# EAGLE board Back (EAGLE 7.4.0)
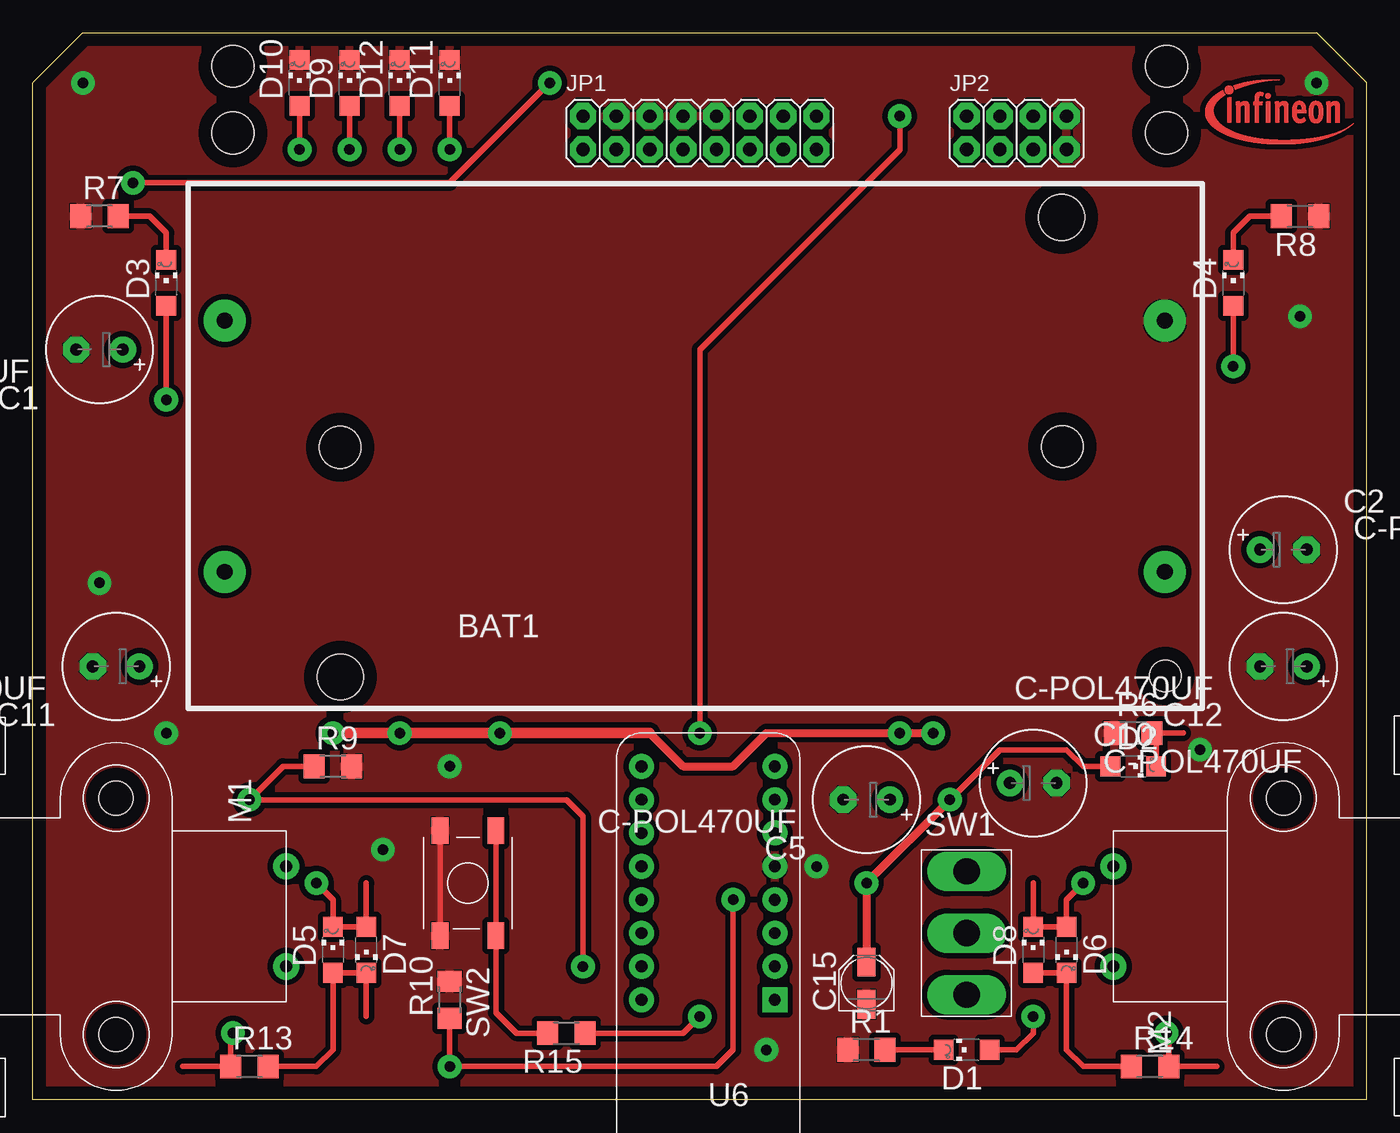
[diagram p0: board, top side]
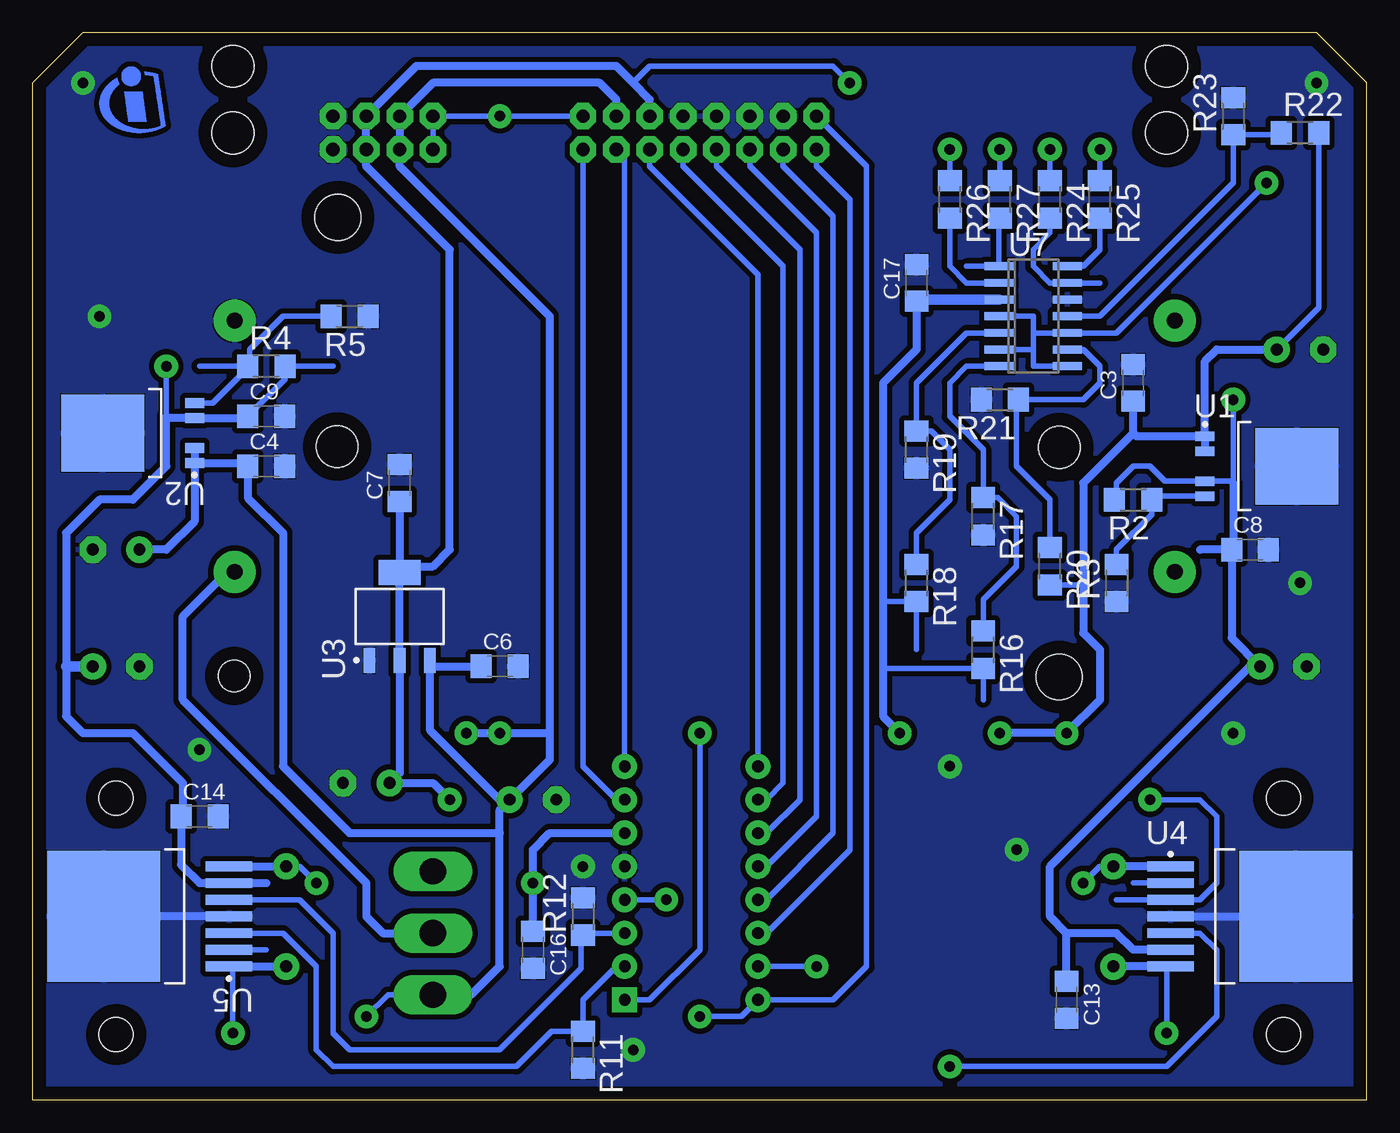
[diagram p1: board, bottom side, seen from below]

Size 101.6 x 81.28 mm. Coordinates in mm from the lower left corner, seen from the top.
Outline: 101.6,0 0,0 0,77.47 3.81,81.28 97.79,81.28 101.6,77.47 101.6,0
Copper layers (1*16): Top 0.035mm / dielectric 1.5mm / Bottom 0.035mm
Design rules "Line_Follower_Rules": minimum track width 0.3mm, minimum drill 0.3mm, track to track 0.17mm, track to pad 0.17mm, pad to pad 0.17mm, via to via 0.17mm, smd to smd 0.17mm, copper to edge 1mm, drill to drill 0.5mm, minimum pad ring 0.5mm, minimum via ring 0.5mm, stop-mask expansion 4mil, vias tented up to drill 0mil, thermal gap 0.1mm
Holes 3.2 mm at 15.24,73.66 86.36,78.74 86.36,73.66 15.24,78.74

## Footprints (pad centres in the part's own frame; a part is rotated, then mirrored left to right if it is on the bottom)
BATT_SUPPORT_KEYSTONE = drill 1.2 pad 3.2: + 34.156,-10.58; ++ -37.45,8.55; - -37.45,-10.58; -- 34.156,8.55 | hole 3.2: -28.657,-1.092; 26.35,-1.036 | hole 3.5: -28.64,-18.583; 26.286,16.418 | hole 2.4: 34.199,-18.509
E3,5-8 = drill 0.9 pad 2: + -1.778,0 | drill 0.9 pad 2 octagon: - 1.778,0
C1206 = smd 1.6 x 1.8: 1 -1.4,0; 2 1.4,0
PANASONIC_B = smd 2.2 x 1.4: + 1.6,0; - -1.6,0
CHIPLED_1206 = smd 1.5 x 1.5: A 0,-1.75; C 0,1.75
2X08 = drill 1.016 octagon: 1 -8.89,-1.27; 2 -8.89,1.27; 3 -6.35,-1.27; 4 -6.35,1.27; 5 -3.81,-1.27; 6 -3.81,1.27; 7 -1.27,-1.27; 8 -1.27,1.27; 9 1.27,-1.27; 10 1.27,1.27; 11 3.81,-1.27; 12 3.81,1.27; 13 6.35,-1.27; 14 6.35,1.27; 15 8.89,-1.27; 16 8.89,1.27
2X04 = drill 1.016 octagon: 1 -3.81,-1.27; 2 -3.81,1.27; 3 -1.27,-1.27; 4 -1.27,1.27; 5 1.27,-1.27; 6 1.27,1.27; 7 3.81,-1.27; 8 3.81,1.27
MICRO-MOTOR = drill 0.9 pad 2: M1 -3.81,12.95; M2 3.81,12.95 | hole 2.6: -9,0; 9,0
R1206 = smd 1.6 x 1.803: 1 -1.422,0; 2 1.422,0
MS111 = drill 2 pad 3 long: P$1 0,4.7; P$2 0,0; P$3 0,-4.7
SWPB_SMD = smd 2.032 x 1.27: P$1 -4,-2; P$2 4,-2; P$3 4,2.25; P$4 -4,2.25
INF-PG-TO252-5-11_L_1PRIMARY = smd 1.45 x 0.75: 1 -4.7,2.28; 2 -4.7,1.14; 4 -4.7,-1.14; 5 -4.7,-2.28 | smd 6.3 x 5.85: 3 2.3,0
INF-PG-SOT223_SC-73_M_1PRIMARY = smd 1.9 x 0.9: 1 -3.35,2.3; 2 -3.35,0; 3 -3.35,-2.3 | smd 1.9 x 3.2: 4 3.35,0
INF-PG-TO263-7-1_L_1PRIMARY = smd 3.55 x 0.75: 1 -6.05,3.81; 2 -6.05,2.54; 3 -6.05,1.27; 4 -6.05,0; 5 -6.05,-1.27; 6 -6.05,-2.54; 7 -6.05,-3.81 | smd 8.6 x 10: 8 3.5,0
XMC_2_GO = drill 0.9 pad 1.676 square: 1 -5.715,0 | drill 0.9 pad 1.676: 2 -5.715,-2.54; 3 -5.715,-5.08; 4 -5.715,-7.62; 5 -5.715,-10.16; 6 -5.715,-12.7; 7 -5.715,-15.24; 8 -5.715,-17.78; 9 4.445,-17.78; 10 4.445,-15.24; 11 4.445,-12.7; 12 4.445,-10.16; 13 4.445,-7.62; 14 4.445,-5.08; 15 4.445,-2.54; 16 4.445,0
SO14 = smd 0.6 x 2.2: 1 -3.81,-2.6; 2 -2.54,-2.6; 3 -1.27,-2.6; 4 0,-2.6; 5 1.27,-2.6; 6 2.54,-2.6; 7 3.81,-2.6; 8 3.81,2.6; 9 2.54,2.6; 10 1.27,2.6; 11 0,2.6; 12 -1.27,2.6; 13 -2.54,2.6; 14 -3.81,2.6

## Placement (x,y rotation side)
BAT1  BATTERY_HOLDER  [BATT_SUPPORT_KEYSTONE]  52.07,50.8 0 top
C1  C-POL470UF  [E3,5-8]  5.08,57.15 180 top
C2  C-POL470UF  [E3,5-8]  95.25,41.91 0 top
C3  C_NONPOL100NF  [C1206]  17.78,54.61 90 bottom
C4  C_NONPOL100NF  [C1206]  83.82,48.26 0 bottom
C5  C-POL470UF  [E3,5-8]  63.5,22.86 180 top
C6  C_NONPOL100NF  [C1206]  66.04,33.02 0 bottom
C7  C_NONPOL100NF  [C1206]  73.66,46.99 90 bottom
C8  C_NONPOL100NF  [C1206]  8.89,41.91 0 bottom
C9  C_NONPOL100NF  [C1206]  83.82,52.07 0 bottom
C10  C-POL470UF  [E3,5-8]  76.2,24.13 0 top
C11  C-POL470UF  [E3,5-8]  6.35,33.02 180 top
C12  C-POL470UF  [E3,5-8]  95.25,33.02 180 top
C13  C_NONPOL100NF  [C1206]  22.86,7.62 270 bottom
C14  C_NONPOL100NF  [C1206]  88.9,21.59 0 bottom
C15  C-POL10UF  [PANASONIC_B]  63.5,8.89 90 top
C16  C_NONPOL100NF  [C1206]  63.5,11.43 270 bottom
C17  C_NONPOL100NF  [C1206]  34.29,62.23 90 bottom
D1  LED  [CHIPLED_1206]  71.12,3.81 90 top
D2  LED  [CHIPLED_1206]  83.82,25.4 270 top
D3  LED  [CHIPLED_1206]  10.16,62.23 0 top
D4  LED  [CHIPLED_1206]  91.44,62.23 0 top
D5  LED  [CHIPLED_1206]  22.86,11.43 0 top
D6  LED  [CHIPLED_1206]  78.74,11.43 180 top
D7  LED  [CHIPLED_1206]  25.4,11.43 180 top
D8  LED  [CHIPLED_1206]  76.2,11.43 0 top
D9  LED  [CHIPLED_1206]  24.13,77.47 0 top
D10  LED  [CHIPLED_1206]  20.32,77.47 0 top
D11  LED  [CHIPLED_1206]  31.75,77.47 0 top
D12  LED  [CHIPLED_1206]  27.94,77.47 0 top
JP1  [2X08]  50.8,73.66 0 top
JP2  [2X04]  74.93,73.66 0 top
M1  MOTOR_PCBMOTOR  [MICRO-MOTOR]  6.35,13.97 270 top
M2  MOTOR_PCBMOTOR  [MICRO-MOTOR]  95.25,13.97 90 top
R1  470R  [R1206]  63.5,3.81 0 top
R2  56k  [R1206]  17.78,45.72 180 bottom
R3  12k  [R1206]  19.05,39.37 90 bottom
R4  56k  [R1206]  83.82,55.88 0 bottom
R5  12k  [R1206]  77.47,59.69 180 bottom
R6  470R  [R1206]  83.82,27.94 0 top
R7  470R  [R1206]  5.08,67.31 0 top
R8  470R  [R1206]  96.52,67.31 180 top
R9  12K  [R1206]  22.86,25.4 0 top
R10  12K  [R1206]  31.75,7.62 90 top
R11  12K  [R1206]  59.69,3.81 270 bottom
R12  12K  [R1206]  59.69,13.97 90 bottom
R13  470R  [R1206]  16.51,2.54 0 top
R14  470R  [R1206]  85.09,2.54 0 top
R15  470R  [R1206]  40.64,5.08 180 top
R16  51k  [R1206]  29.21,34.29 270 bottom
R17  43k  [R1206]  29.21,44.45 270 bottom
R18  47k  [R1206]  34.29,39.37 270 bottom
R19  43k  [R1206]  34.29,49.53 270 bottom
R20  62k  [R1206]  24.13,40.64 270 bottom
R21  43k  [R1206]  27.94,53.34 180 bottom
R22  56k  [R1206]  5.08,73.66 0 bottom
R23  43k  [R1206]  10.16,74.93 90 bottom
R24  470R  [R1206]  24.13,68.58 270 bottom
R25  470R  [R1206]  20.32,68.58 270 bottom
R26  470R  [R1206]  31.75,68.58 270 bottom
R27  470R  [R1206]  27.94,68.58 270 bottom
SW1  SWITCH1OFF2  [MS111]  71.12,12.7 0 top
SW2  PUSH_BUTTON_SMD  [SWPB_SMD]  33.02,16.51 270 top
U1  TLF1963  [INF-PG-TO252-5-11_L_1PRIMARY]  7.62,48.26 0 bottom
U2  TLF1963  [INF-PG-TO252-5-11_L_1PRIMARY]  93.98,50.8 180 bottom
U3  IFX8117ME_3V3  [INF-PG-SOT223_SC-73_M_1PRIMARY]  73.66,36.83 90 bottom
U4  TLE5206  [INF-PG-TO263-7-1_L_1PRIMARY]  8.89,13.97 0 bottom
U5  TLE5206  [INF-PG-TO263-7-1_L_1PRIMARY]  92.71,13.97 180 bottom
U6  XMC_2_GO  [XMC_2_GO]  50.8,7.62 180 top
U7  LM339  [SO14]  25.4,59.69 270 bottom
U$1  [INFINEON_LOGO_INFINEON_LOGO_5]  88.9,72.39 0 top
U$2  [INFINEON_LOGO_INFINEON_ICON_5]  96.52,73.66 0 bottom

## Library data of the parts
BAT1 SW2 U7 U$1 U$2 = Line_Follower_LIBV3.1
C1-C17 D1-D12 M1 M2 R1-R27 SW1 U1-U6 = Line_Follower_LIBV3
JP1 JP2 = pinhead

## Nets
8.4V: BAT1.+ SW1.P$2
+3V3: C7.1 C10.+ C15.+ C16.1 D2.A JP1.12 JP2.5 JP2.6 U3.2 U3.4 U6.6 U7.4 U7.6 U7.8 U7.10
GND: BAT1.-- C1.- C2.- C3.2 C4.2 C5.- C6.2 C7.2 C8.2 C9.2 C10.- C11.- C12.- C13.2 C14.2 C15.- C16.2 C17.2 D9.C D10.C D11.C D12.C JP1.4 JP1.6 JP1.8 JP1.10 JP2.7 JP2.8 R1.1 R3.1 R5.1 R6.1 R7.1 R8.1 R9.2 R10.2 R11.2 R12.2 R17.2 R19.2 R21.2 R23.2 SW2.P$1 SW2.P$2 U1.3 U2.3 U3.1 U4.4 U4.8 U5.4 U5.8 U6.5 U7.12
LS1: JP1.3 U6.13
LS2: JP1.1 U6.14
LS3: JP1.5 U6.12
LS4: JP1.7 U6.11
LS5: JP1.9 U6.10
LS6: JP1.11 U6.9
LS7: JP1.13 U6.8
LS8: JP1.15 U6.7
M1_IN1_DIG: R9.1 U4.3 U6.15
M1_IN2_PWM: R10.1 U4.5 U6.4
M2_IN1_DIG: R11.1 U5.3 U6.2
M2_IN2_PWM: R12.1 U5.5 U6.3
MS1: JP1.2 R15.1 U6.16
MS2: JP1.16 JP2.1 JP2.2 U6.1
N$2: R2.1 R3.2 U1.5
N$3: D1.C R1.2
N$4: D2.C R6.2
N$5: R4.1 R5.2 U2.5
N$6: D4.C R8.2
N$7: D3.C R7.2
N$8: D5.C D7.A M1.M1 U4.1
N$10: D5.A D7.C R13.2
N$11: M1.M2 R13.1 U4.7
N$12: D6.C D8.A R14.1
N$13: M2.M1 R14.2 U5.1
N$14: D6.A D8.C M2.M2 U5.7
N$23: D10.A R25.1
N$24: R15.2 SW2.P$3 SW2.P$4
N$26: R24.2 U7.13
N$27: R25.2 U7.14
N$29: R26.2 U7.2
N$30: R27.2 U7.1
N$31: D11.A R26.1
N$32: D12.A R27.1
N$33: D9.A R24.1
N$35: R16.1 R17.1 U7.7
N$36: R18.1 R19.1 U7.5
N$37: R20.1 R21.1 U7.9
N$38: R22.1 R23.1 U7.11
V+: C1.+ C2.+ C3.1 C4.1 C5.+ C6.1 C17.1 D1.A JP1.14 JP2.3 JP2.4 R16.2 R18.2 R20.2 R22.2 SW1.P$3 U1.1 U1.2 U2.1 U2.2 U3.3 U7.3
V+M1: C8.1 C11.+ C13.1 D3.A R2.2 U1.4 U4.6
V+M2: C9.1 C12.+ C14.1 D4.A R4.2 U2.4 U5.6

## Tracks (layer width: path | path; a pad name or v marks a point on that pad's centre or on a via)
8.4V
  Bottom 0.61: SW1.P$2 74.93,12.7 76.2,13.97 76.2,16.51 90.17,30.48 90.17,36.83 86.78,40.22 BAT1.+
+3V3  (via drill 0.8 pad 1.78)
  Top 0.406: v7.62,69.85 31.75,69.85 v39.37,77.47 | D2.A 80.01,25.4 78.74,26.67 73.66,26.67 v69.85,22.86
  Top 0.61: C15.+ v63.5,16.51 v69.85,22.86
  Bottom 0.406: 25.4,58.42 25.4,57.15 | 25.4,57.15 25.4,55.88 U7.8 | 25.4,58.42 U7.10 19.05,58.42 v7.62,69.85 | U7.6 25.4,57.15 | U7.4 25.4,59.69 25.4,58.42 | 55.88,77.47 54.61,78.74 40.64,78.74 v39.37,77.47
  Bottom 0.61: 73.66,39.37 U3.2 73.66,24.89 C10.+ 71.12,24.13 v69.85,22.86 | 73.66,39.37 U3.4 | C16.1 v63.5,16.51 63.5,19.05 62.23,20.32 U6.6 | JP1.12 54.61,76.2 55.88,77.47 57.15,78.74 72.39,78.74 JP2.6 JP2.5 76.2,71.12 69.85,64.77 69.85,41.91 71.12,40.64 72.39,40.64 | 72.39,40.64 73.2,40.64 U3.4 | C7.1 U3.4 | 73.66,39.37 72.39,40.64
GND  (via drill 0.8 pad 1.78)
  Top 0.406: SW2.P$1 SW2.P$2
  Bottom 0.61: U5.4 U5.8 | U4.4 U4.8
  other vias: 3.81,77.47 97.79,77.47 96.52,59.69 5.08,39.37 10.16,27.94 31.75,25.4 55.88,3.81 59.69,17.78 88.9,26.67 26.67,19.05
  pour Bottom (isolate 0.406): 3.81,81.28 97.79,81.28 101.6,77.47 101.6,0 0,0 0,77.47
  pour Top (isolate 0.406): 3.81,81.28 97.79,81.28 101.6,77.47 101.6,0 0,0 0,77.47
LS1
  Bottom 0.406: U6.13 45.72,15.24 40.64,20.32 40.64,67.31 44.45,71.12 JP1.3
LS2
  Bottom 0.406: U6.14 45.72,12.7 39.37,19.05 39.37,68.58 41.91,71.12 JP1.1
LS3
  Bottom 0.406: U6.12 45.72,17.78 41.91,21.59 41.91,66.04 46.99,71.12 JP1.5
LS4
  Bottom 0.406: U6.11 45.72,20.32 43.18,22.86 43.18,64.77 49.53,71.12 JP1.7
LS5
  Bottom 0.406: U6.10 45.72,22.86 44.45,24.13 44.45,63.5 52.07,71.12 JP1.9
LS6
  Bottom 0.406: U6.9 46.35,62.87 54.61,71.12 JP1.11
LS7
  Bottom 0.406: JP1.13 56.52,71.75 U6.8
LS8
  Bottom 0.406: U6.7 57.15,22.86 59.69,25.4 JP1.15
M1_IN1_DIG  (via drill 0.8 pad 1.78)
  Top 0.406: R9.1 19.05,25.4 v16.51,22.86 40.64,22.86 41.91,21.59 v41.91,10.16
  Bottom 0.406: U4.3 12.7,15.24 11.43,16.51 11.43,21.59 12.7,22.86 v16.51,22.86 | v41.91,10.16 U6.15
M1_IN2_PWM  (via drill 0.8 pad 1.78)
  Top 0.406: R10.1 v31.75,2.54 52.07,2.54 53.34,3.81 v53.34,15.24
  Bottom 0.406: U4.5 12.7,12.7 11.43,11.43 11.43,6.35 15.24,2.54 v31.75,2.54 | U6.4 v53.34,15.24
M2_IN1_DIG
  Bottom 0.406: U5.3 82.55,12.7 80.01,10.16 80.01,3.81 78.74,2.54 64.77,2.54 62.08,5.23 R11.1 59.69,7.62 57.15,10.16 U6.2
M2_IN2_PWM
  Bottom 0.406: U5.5 81.28,15.24 78.74,12.7 78.74,5.08 77.47,3.81 66.04,3.81 59.84,10.01 59.84,12.4 R12.1 59.54,12.7 U6.3
MS1  (via drill 0.8 pad 1.78)
  Top 0.406: R15.1 49.53,5.08 v50.8,6.35
  Bottom 0.406: JP1.2 38.1,71.12 38.1,10.16 40.64,7.62 U6.16 47.62,6.35 v50.8,6.35
MS2  (via drill 0.8 pad 1.78)
  Top 0.406: v50.8,27.94 50.8,57.15 66.04,72.39 v66.04,74.93
  Bottom 0.406: JP1.16 v66.04,74.93 JP2.2 JP2.1 | v50.8,27.94 50.8,11.43 54.61,7.62 U6.1
N$1
  Bottom 0.61: 86.36,16.51 83.82,16.51
N$2
  Bottom 0.406: U1.5 16.1,45.98 R2.1 16.36,44.6 19.05,41.91 R3.2
N$3
  Top 0.406: D1.C R1.2
N$4
  Top 0.406: D2.C 85.57,27.61 R6.2
N$5
  Bottom 0.406: R5.2 82.55,59.69 85.09,57.15 85.09,56.03 R4.1 85.09,55.88 87.89,53.08 U2.5
N$6
  Top 0.406: D4.C 91.44,66.04 92.71,67.31 R8.2
N$7
  Top 0.406: D3.C 10.16,66.04 8.89,67.31 R7.2
N$8  (via drill 0.8 pad 1.78)
  Top 0.406: v21.59,16.51 22.86,15.24 D5.C D7.A
  Bottom 0.406: M1.M1 20.32,17.78 v21.59,16.51
  Bottom 0.61: U4.1 M1.M1
N$9
  Bottom 0.406: 29.21,33.02 29.21,30.48
N$10
  Top 0.406: D7.C D5.A 22.86,3.81 21.59,2.54 R13.2
N$11  (via drill 0.8 pad 1.78)
  Top 0.406: R13.1 15.09,4.93 v15.24,5.08
  Bottom 0.406: v15.24,5.08 15.24,9.86 U4.7
  Bottom 0.61: U4.7 M1.M2
N$12
  Top 0.406: D8.A D6.C 78.74,3.81 80.01,2.54 R14.1
N$13  (via drill 0.8 pad 1.78)
  Top 0.406: R14.2 86.51,4.93 v86.36,5.08
  Bottom 0.406: v86.36,5.08 86.36,9.86 U5.1
  Bottom 0.61: U5.1 M2.M1
N$14  (via drill 0.8 pad 1.78)
  Top 0.406: D8.C D6.A 78.74,15.24 v80.01,16.51
  Bottom 0.406: M2.M2 81.28,17.78 v80.01,16.51
  Bottom 0.61: U5.7 M2.M2
N$15
  Top 0.406: 86.36,2.54 90.17,2.54
N$16
  Bottom 0.406: 85.09,55.88 88.9,55.88
N$17
  Top 0.406: 76.2,12.7 76.2,16.51
N$18
  Bottom 0.406: 34.29,38.1 34.29,34.29
N$19
  Top 0.406: 15.24,2.54 11.43,2.54
N$20
  Top 0.406: 25.4,10.16 25.4,6.35
N$21
  Top 0.406: 25.4,12.7 25.4,16.51
N$22
  Bottom 0.61: 10.16,41.91 12.7,41.91
N$23  (via drill 0.8 pad 1.78)
  Top 0.406: D10.A v20.32,72.39
  Bottom 0.406: v20.32,72.39 R25.1
N$24
  Top 0.406: SW2.P$4 SW2.P$3 35.27,6.64 36.83,5.08 R15.2 39.37,5.08
N$26
  Bottom 0.406: R24.2 24.13,66.04 25.4,64.77 25.4,63.5 24.13,62.23 U7.13 20.32,62.23
N$27
  Bottom 0.406: U7.14 21.59,63.5 20.32,64.77 R25.2
N$29
  Bottom 0.406: U7.2 30.48,62.23 31.75,63.5 R26.2
N$30
  Bottom 0.406: U7.1 28,67.1 R27.2
N$31  (via drill 0.8 pad 1.78)
  Top 0.406: D11.A v31.75,72.39
  Bottom 0.406: v31.75,72.39 R26.1
N$32  (via drill 0.8 pad 1.78)
  Top 0.406: D12.A v27.94,72.39
  Bottom 0.406: v27.94,72.39 R27.1
N$33  (via drill 0.8 pad 1.78)
  Top 0.406: D9.A v24.13,72.39
  Bottom 0.406: v24.13,72.39 R24.1
N$34
  Top 0.406: 85.09,27.94 87.63,27.94
N$35
  Bottom 0.406: U7.7 30.48,55.88 31.75,54.61 31.75,52.07 29.21,49.53 R17.1 28.09,45.87 26.67,44.45 26.67,40.64 29.21,38.1 R16.1
N$36
  Bottom 0.406: U7.5 30.48,58.42 34.29,54.61 R19.1 33.17,50.95 31.75,49.53 31.75,45.72 34.29,43.18 R18.1
N$37
  Bottom 0.406: U7.9 21.59,57.15 20.32,55.88 20.32,54.61 21.59,53.34 R21.1 26.67,53.34 26.67,48.26 24.13,45.72 R20.1
N$38
  Bottom 0.406: U7.11 20.32,59.69 10.16,69.85 R23.1 6.65,73.51 R22.1
N$40
  Bottom 0.406: 27.94,63.5 30.48,63.5
N$41
  Bottom 0.406: 82.55,55.88 78.74,55.88
N$42
  Bottom 0.406: 13.97,16.51 17.78,16.51
N$43
  Bottom 0.406: 15.24,15.24 19.05,15.24
N$44
  Bottom 0.406: 86.36,11.43 83.82,11.43
V+  (via drill 0.8 pad 1.78)
  Top 0.406: v76.2,6.35 76.2,5.08 74.93,3.81 D1.A
  Top 0.61: 46.99,27.94 49.53,25.4 53.34,25.4 55.88,27.94 v66.04,27.94 v68.58,27.94
  Top 0.813: 46.99,27.94 v35.56,27.94 v27.94,27.94 v22.86,27.94
  Bottom 0.406: SW1.P$3 74.55,8 v76.2,6.35 | U7.3 34.16,60.96 C17.1 | R22.2 3.66,60.35 C1.+ | R16.2 36.68,32.87 36.83,33.02 | R18.2 36.68,37.95 36.83,38.1 | R20.2 21.59,39.22 21.59,39.37
  Bottom 0.61: U3.3 71.36,33.02 | U2.2 U2.1 | SW1.P$3 68.2,8 66.04,10.16 66.04,20.32 | U2.1 89.28,44.07 91.44,41.91 C2.+ | 66.04,20.32 66.04,22.1 C5.+ | U2.1 85.48,48.52 C4.1 85.22,45.85 82.55,43.18 82.55,25.4 77.47,20.32 66.04,20.32 | U1.1 U1.2 | JP1.14 57.15,76.2 58.42,77.47 71.12,77.47 JP2.4 JP2.3 73.66,71.12 62.23,59.69 62.23,27.94 | 62.23,27.94 62.23,25.91 C5.+ | 71.36,33.02 C6.1 | v68.58,27.94 v66.04,27.94 62.23,27.94 | C5.+ 66.04,22.86 71.36,28.18 71.36,33.02 | U1.1 12.32,56.26 11.43,57.15 C1.+ | 17.78,53.34 C3.1 17.78,50.8 | U1.1 17.52,50.54 17.78,50.8 | 34.29,60.96 34.29,57.15 36.83,54.61 36.83,38.1 36.83,33.02 36.83,29.21 v35.56,27.94 | 17.78,50.8 21.59,46.99 21.59,39.37 21.59,35.56 20.32,34.29 20.32,30.48 v22.86,27.94 v27.94,27.94
  Bottom 0.813: U7.3 34.29,60.96
V+M1  (via drill 0.8 pad 1.78)
  Top 0.406: v10.16,53.34 D3.A
  Bottom 0.406: v10.16,53.34 10.16,46.99 10.29,47.12 U1.4 15.37,47.12 16.51,48.26 17.78,48.26 19.05,46.99 19.05,45.87 R2.2
  Bottom 0.61: U4.6 17.78,11.43 19.05,12.7 22.86,12.7 | 22.86,12.7 24.13,13.97 24.13,17.78 8.89,33.02 C11.+ 10.29,35.18 C8.1 10.16,42.04 10.16,46.99 | C13.1 22.86,12.7
V+M2  (via drill 0.8 pad 1.78)
  Top 0.406: D4.A v91.44,55.88
  Bottom 0.406: v91.44,55.88 91.44,52.07 | R4.2 82.4,54.89 C9.1
  Bottom 0.61: U5.6 88.9,16.51 90.3,17.91 C14.1 90.17,21.72 90.17,24.13 93.98,27.94 97.79,27.94 99.06,29.21 99.06,33.02 99.06,43.18 96.52,45.72 93.98,45.72 91.44,48.26 91.44,52.07 91.31,51.94 U2.4 85.35,51.94 C9.1 85.09,52.2 84.81,52.2
  Bottom 0.813: C12.+ 99.06,33.02